# EAGLE board BPW5003-5VLCD-V1.1 (EAGLE 5.06)
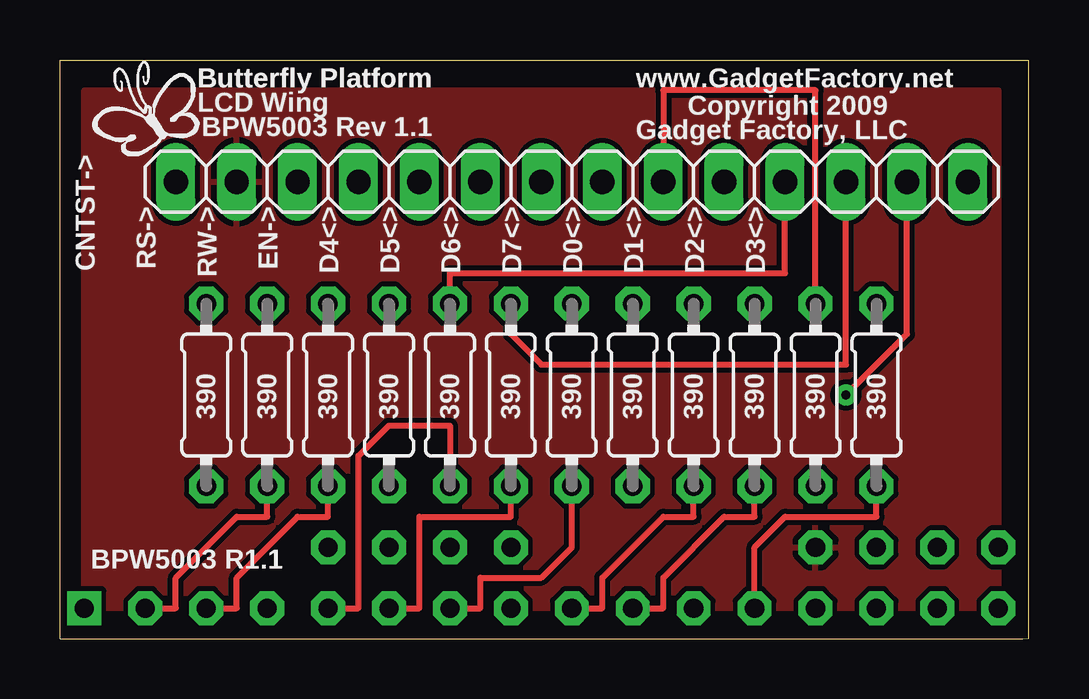
[diagram p0: board, top side]
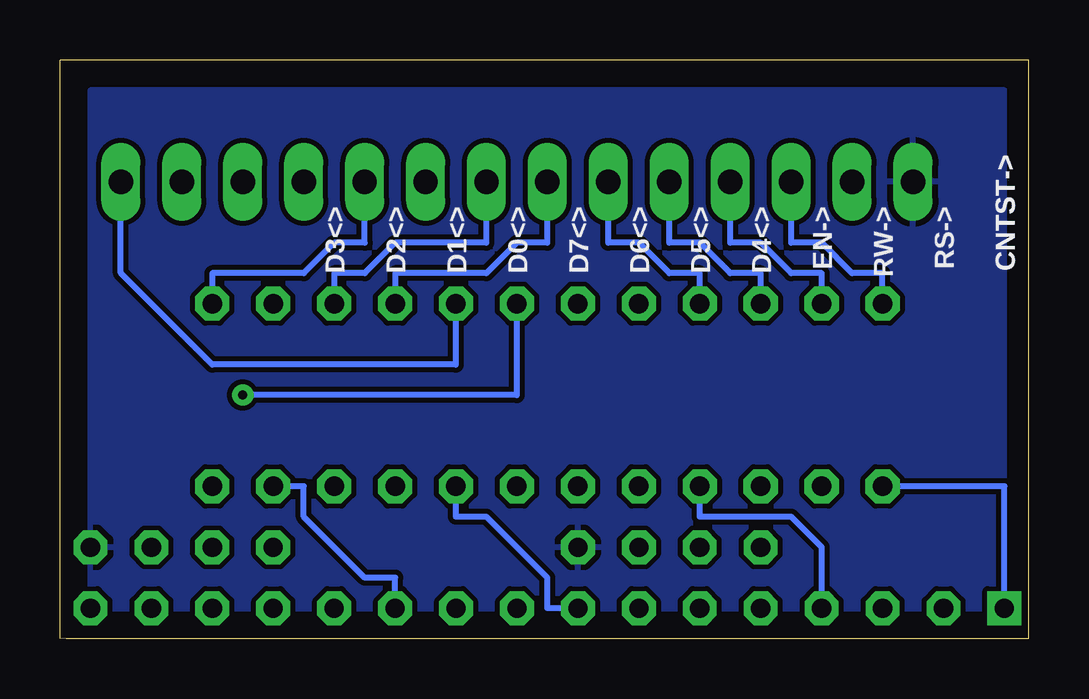
[diagram p1: board, bottom side, seen from below]

Size 40.39 x 24.13 mm. Coordinates in mm from the lower left corner, seen from the top.
Outline: 0,0 40.13,0 40.39,0.03 40.39,24.13 0,24.13 0,0
Copper layers (1*16): Top 0.035mm / dielectric 1.5mm / Bottom 0.035mm
Design rules "SparkFun_Derived_GoldePheonix_10mil": minimum track width 10mil, minimum drill 15mil, track to track 8mil, track to pad 8mil, pad to pad 8mil, via to via 8mil, smd to smd 8mil, copper to edge 10mil, drill to drill 8mil, minimum pad ring 12mil, minimum via ring 10mil, stop-mask expansion 4mil, vias tented up to drill 18mil, thermal gap 10mil

## Footprints (pad centres in the part's own frame; a part is rotated, then mirrored left to right if it is on the bottom)
1X14 = drill 1.016 long: 1 -16.51,0; 2 -13.97,0; 3 -11.43,0; 4 -8.89,0; 5 -6.35,0; 6 -3.81,0; 7 -1.27,0; 8 1.27,0; 9 3.81,0; 10 6.35,0; 11 8.89,0; 12 11.43,0; 13 13.97,0; 14 16.51,0
WING_16BIT = drill 0.8 octagon: 2V5@1 36.83,3.81; 2V5@2 16.51,3.81; 3V3@1 34.29,3.81; 3V3@2 13.97,3.81; 5V@1 31.75,3.81; 5V@2 11.43,3.81; B2 3.81,1.27; B3 6.35,1.27; B4 8.89,1.27; B5 11.43,1.27; B6 13.97,1.27; B7 16.51,1.27; B8 19.05,1.27; B9 21.59,1.27; B10 24.13,1.27; B11 26.67,1.27; B12 29.21,1.27; B13 31.75,1.27; B14 34.29,1.27; B15 36.83,1.27; B16 39.37,1.27; GND@1 39.37,3.81; GND@2 19.05,3.81 | drill 0.8 square: B1 1.27,1.27
0204/7 = drill 0.813 octagon: 1 -3.81,0; 2 3.81,0

## Placement (x,y rotation side)
E$1  [1X14]  21.34,19.05 0 top
E$2  [WING_16BIT]  -0.25,0 0 top
E$3  [0204/7]  6.1,10.16 90 top
E$4  [0204/7]  8.64,10.16 90 top
E$5  [0204/7]  11.18,10.16 90 top
E$6  [0204/7]  13.72,10.16 90 top
E$7  [0204/7]  16.26,10.16 90 top
E$8  [0204/7]  18.8,10.16 90 top
E$9  [0204/7]  21.34,10.16 90 top
E$10  [0204/7]  23.88,10.16 90 top
E$11  [0204/7]  26.42,10.16 90 top
E$12  [0204/7]  28.96,10.16 90 top
E$13  [0204/7]  31.5,10.16 90 top
E$14  [0204/7]  34.04,10.16 90 top

## Library data of the parts
E$1 = pinhead
E$2 = GadgetFactory_Pub
E$3-E$14 = resistor

## Nets
5V0: E$1.2 E$2.5V@1
!CS: E$1.11 E$7.2
DAT2: E$1.6 E$6.2
GND: E$1.1 E$2.GND@1 E$2.GND@2
MISO: E$1.14 E$10.2
MOSI: E$1.12 E$8.2
S$1: E$1.4 E$4.2
S$2: E$1.5 E$5.2
S$3: E$1.7 E$11.2
S$4: E$1.8 E$12.2
S$5: E$1.9 E$13.2
S$6: E$1.10 E$14.2
S$7: E$2.B1 E$3.1
S$8: E$1.3 E$3.2
S$9: E$2.B2 E$4.1
S$10: E$2.B3 E$5.1
S$11: E$2.B4 E$6.1
S$12: E$2.B9 E$11.1
S$13: E$2.B10 E$12.1
S$14: E$2.B11 E$13.1
S$15: E$2.B12 E$14.1
S$16: E$2.B8 E$10.1
S$17: E$2.B7 E$9.1
S$18: E$2.B6 E$8.1
S$19: E$2.B5 E$7.1
SCK: E$1.13 E$9.2

## Tracks (layer width: path | path; a pad name or v marks a point on that pad's centre or on a via)
5V0
  pour Top: 1.02,22.86 39.12,22.86 39.12,1.27 1.02,1.27
!CS
  Top 0.254: E$7.2 16.26,15.24 30.23,15.24 E$1.11
DAT2
  Bottom 0.254: E$6.2 13.72,15.24 14.99,15.24 16.26,16.51 17.53,16.51 E$1.6
GND
  pour Bottom: 1.02,1.27 1.02,22.86 39.12,22.86 39.12,1.27
MISO
  Bottom 0.254: E$10.2 23.88,11.43 34.04,11.43 37.85,15.24 E$1.14
MOSI
  Top 0.254: E$8.2 18.8,12.7 20.07,11.43 32.77,11.43 E$1.12
S$1
  Bottom 0.254: E$4.2 8.64,15.24 9.91,15.24 11.18,16.51 12.45,16.51 E$1.4
S$2
  Bottom 0.254: E$5.2 11.18,15.24 12.45,15.24 13.72,16.51 14.99,16.51 E$1.5
S$3
  Bottom 0.254: E$11.2 26.42,15.24 22.61,15.24 21.34,16.51 20.07,16.51 E$1.7
S$4
  Bottom 0.254: E$12.2 28.96,15.24 27.69,15.24 26.42,16.51 22.61,16.51 E$1.8
S$5
  Top 0.254: E$13.2 31.5,22.86 25.15,22.86 E$1.9
S$6
  Bottom 0.254: E$14.2 34.04,15.24 30.23,15.24 28.96,16.51 27.69,16.51 E$1.10
S$7
  Bottom 0.254: E$2.B1 1.02,6.35 E$3.1
S$8
  Bottom 0.254: E$3.2 6.1,15.24 7.37,15.24 8.64,16.51 9.91,16.51 E$1.3
S$9
  Top 0.254: E$2.B2 4.83,1.27 4.83,2.54 7.37,5.08 8.64,5.08 E$4.1
S$10
  Top 0.254: E$2.B3 7.37,1.27 7.37,2.54 9.91,5.08 11.18,5.08 E$5.1
S$11
  Bottom 0.254: E$2.B4 8.64,3.81 9.91,5.08 13.72,5.08 E$6.1
S$12
  Top 0.254: E$2.B9 22.61,1.27 22.61,2.54 25.15,5.08 26.42,5.08 E$11.1
S$13
  Top 0.254: E$2.B10 25.15,1.27 25.15,2.54 27.69,5.08 28.96,5.08 E$12.1
S$14
  Bottom 0.254: E$2.B11 26.42,2.54 27.69,2.54 30.23,5.08 30.23,6.35 E$13.1
S$15
  Top 0.254: E$2.B12 28.96,3.81 30.23,5.08 34.04,5.08 E$14.1
S$16
  Bottom 0.254: E$2.B8 20.07,1.27 20.07,2.54 22.61,5.08 23.88,5.08 E$10.1
S$17
  Top 0.254: E$2.B7 17.53,1.27 17.53,2.54 20.07,2.54 21.34,3.81 E$9.1
S$18
  Top 0.254: E$2.B6 14.99,1.27 14.99,5.08 18.8,5.08 E$8.1
S$19
  Top 0.254: E$2.B5 12.45,1.27 12.45,7.62 13.72,8.89 16.26,8.89 E$7.1
SCK  (via drill 0.38)
  Top 0.254: v32.77,10.16 35.31,12.7 E$1.13
  Bottom 0.254: E$9.2 21.34,10.16 v32.77,10.16

## Text on the board
tPlace: Butterfly Platform | Butterfly Platform | www.GadgetFactory.net | LCD Wing | Copyright 2009 | BPW5003 Rev 1.1 | Gadget Factory, LLC | CNTST-> | RS-> | RW-> | EN-> | D4<> | D5<> | D6<> | D7<> | D0<> | D1<> | D2<> | D3<> | 390 | 390 | 390 | 390 | 390 | 390 | 390 | 390 | 390 | 390 | 390 | 390 | BPW5003 R1.1
bPlace: CNTST-> | CNTST-> | RS-> | RW-> | EN-> | D4<> | D5<> | D6<> | D7<> | D0<> | D1<> | D2<> | D3<>